# Altium PCB 388D_Control_v1_PCB1_temp.PcbDoc (part 3 of 4)
Units mil, origin at the board's own origin, x right, y up, seen from the top; angles counter-clockwise.
Board outline 4500 x 3200 mil, 6 copper layers (Top Layer, Singal Layer 2, Signal layer 3, Signal Layer 4, Signal Layer 5, Bottom Layer), stack 63.307 mil thick; 386 components, 377 nets, 1673 pads, 351 vias.
Unrouted connection lines stored in the file: 1151.
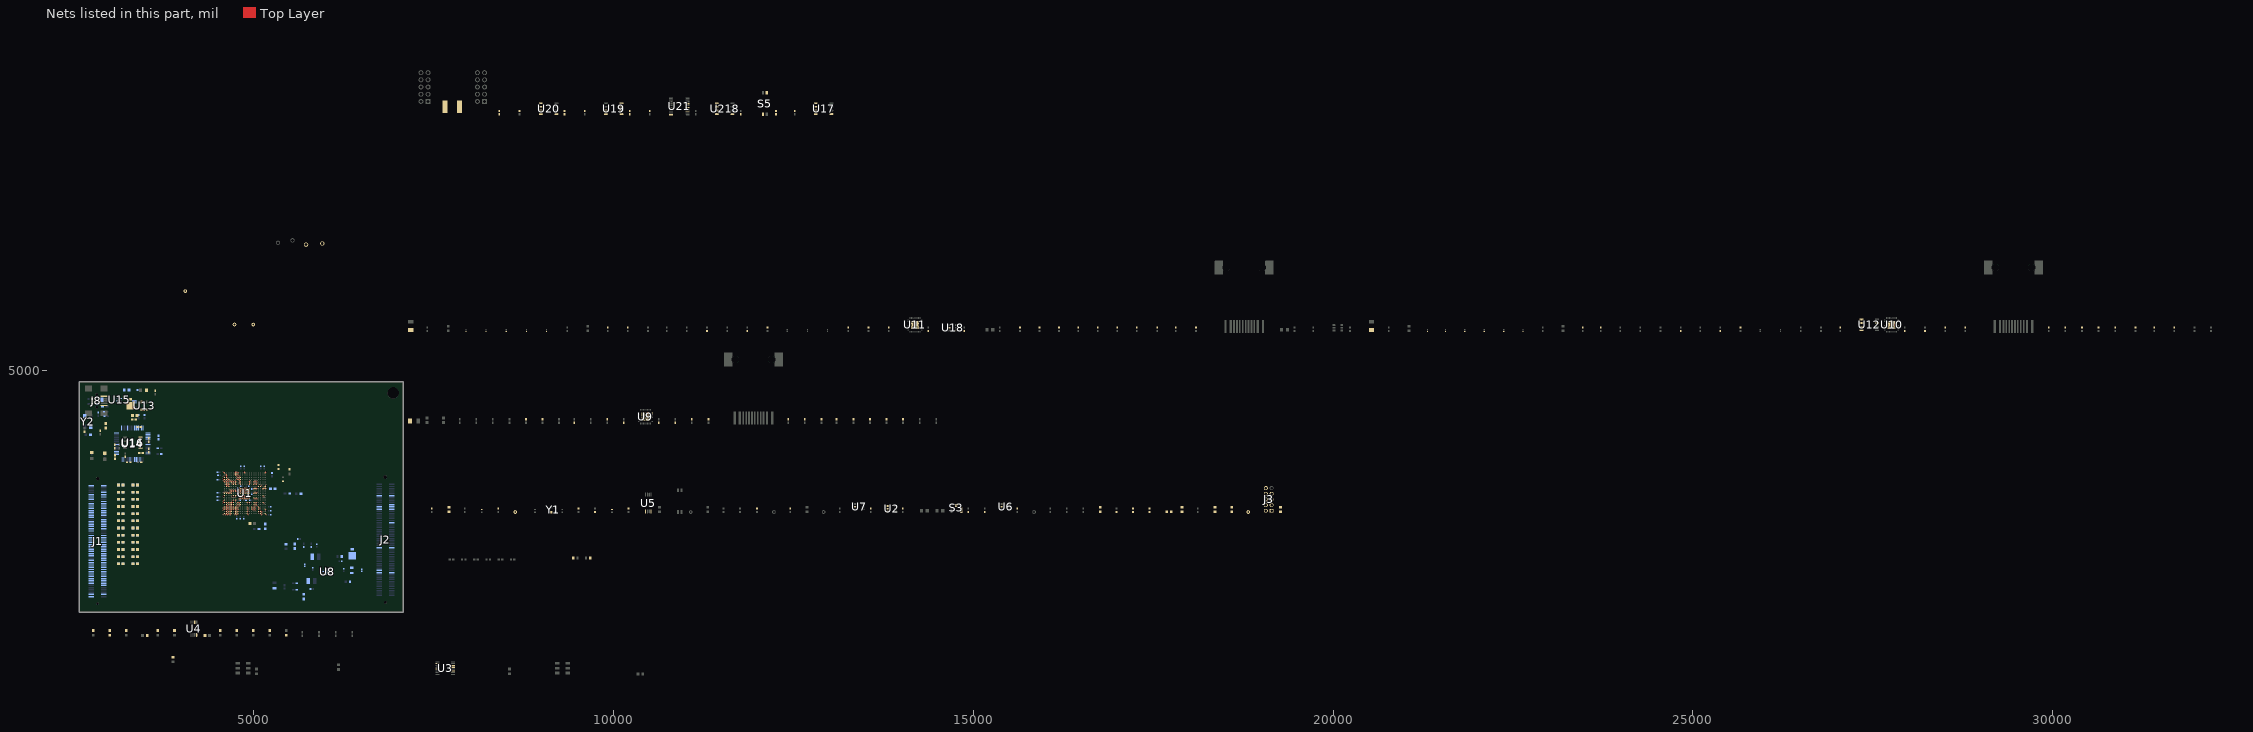
[diagram p2: the nets of this part, all layers, seen from the top]

## Part data (continued)
R154: library part CMP-0026834-3, "RES, 12 k, 5%, 0.063 W, AEC-Q200 Grade 0, 0402", Manufacturer=Vishay-Dale, Power_W=63mW, Supplier Part Number 1=541-12KJCT-ND, TempCo="200 ppm/C", Tolerance_%=5%, Value2=0.063W, Value_Code=12k0, ValueDisplayed=12k, AEC Category=Q200, AEC Grade=0, AEC Qualified=Y, ComponentLink1Description="Datasheet link", ComponentLink1URL=http://www.vishay.com/docs/20035/dcrcwe3.pdf, CompType=Resistor, EIA_Code=E24, MountType=SMT, PackageReference=0402, PartNumber=CRCW040212K0JNED, Res_ohm=12k, RoHS=E, SizeArea_mm2=0.5, SizeX_mm=1, SizeY_mm=0.5, SizeZ_mm=0.6, Supplier 1=Digi-Key, Supplier 2=Newark, Supplier 3=Mouser, Supplier Part Number 2=89M6603, Supplier Part Number 3=71-CRCW040212K0JNED, Technology="Thick Film", Value1=5%, VDC_V=50V
S1 S2: library part CMP-0002233-1, "Switch, Dual SPDT,  2 Pos, 0.1A, 6VDC, SMD", CurrentRating_mA=100A, Manufacturer="Copal Electronics", Supplier Part Number 1=CASD20JCT-ND, Circuit=SPDT, ComponentLink1Description="Datasheet Link", ComponentLink1URL=http://www.nidec-copal-electronics.com/e/catalog/switch/cas.pdf, CompType=Switch, LatestRevisionDate=2017-03-09, MountType=SMT, Orientation="Top Actuated", PackageReference=5.4x3.9mm, PartNumber=CAS-D20TA, PositionCount=2, Publisher="Texas Instruments", RoHS=Y, Supplier 1=Digi-Key, SwitchFunction=On-On, VDC_V=6V
S3: library part CMP-0002193-2, "Switch, SPST-NO, Off-Mom, 12 V, SMD", CurrentRating_mA=50A, Manufacturer="Omron Electronic Components", Supplier Part Number 1=SW1021CT-ND, Circuit=SPST-NO, ComponentLink1Description="Datasheet URL", ComponentLink1URL=http://www.omron.com/ecb/products/pdf/en-b3u.pdf, CompType=Switch, LatestRevisionDate=2017-03-09, MountType=SMT, Orientation="Top Actuated", PackageReference="SMD, 3-Leads, Body 3x2.5mm", PartNumber=B3U-1100P, PositionCount=1, Publisher="Texas Instruments", RoHS=Y, Supplier 1=Digi-Key, Supplier 2=Newark, Supplier 3=Mouser, Supplier Part Number 2=39M4619, Supplier Part Number 3=653-B3U-1100P, SwitchFunction=Off-Mom, VDC_V=12V
S4 S5: library part CMP-0002230-1, "Switch, SPST, 2 Pos, 25mA, 24VDC, SMD", CurrentRating_mA=25A, Manufacturer="CTS Electrocomponents", Supplier Part Number 1=CT2182LPST-ND, Circuit=SPST, ComponentLink1Description="Datasheet Link", ComponentLink1URL=http://www.ctscorp.com/components/Datasheets/218.pdf, CompType=Switch, LatestRevisionDate=2017-03-09, MountType=SMT, Orientation="Top Actuated", PackageReference=3.71x5.8mm, PartNumber=218-2LPST, PositionCount=2, Publisher="Texas Instruments", RoHS=Y, Supplier 1=Digi-Key, Supplier 2=Mouser, Supplier Part Number 2=774-2182LPST, SwitchFunction=Off-On, VDC_V=24V
TP1 TP2 TP3 TP4: library part CMP-002-00037-2, "Test Point, Orange, Height 4.6 mm, Tail Length 3 mm, 1-Pin THD, RoHS", Colour=Orange, Manufacturer=Keystone, Package Description="1-Pin Through Hole Device, Dia 2.54 mm", Package Quantity=10, Case/Package=5003, Connector Type=TestPoint, Contact Material=Bronze, Contact Plating=Tin, Datasheet URL=http://keyelco.com/userAssets/file/M65p56.pdf, Datasheet Version=Jun-15, Diameter=2.54mm, Manufacturer URL=http://www.keyelco.com/, Mounting Technology=TH, Package Reference=5003, Packaging=Bulk, Pins=1, RoHS Compliant=True
TP5 TP6 TP7 TP8 TP9 TP10 TP11 TP12 TP13: library part CMP-0078143-3, "TEST POINT.  No entry in BOM.", Manufacturer=N/A, CompType=Testpoint, PackageReference=N/A, PartNumber=N/A
U1: library part CMP-012-000147-1, "TMS320F28388DZWTS, ZWT0337A (NFBGA-337)", Alternate Manufacturer="Texas Instruments", AEC Category=Q200, AEC Qualified=N, Available Preview Images=2D, ComponentLink1Description="Datasheet Link", ComponentLink1URL=http://www.ti.com/lit/ds/symlink/tms320f28388d.pdf, ComponentLink2Description="Product Folder", ComponentLink2URL=http://www.ti.com/product/tms320f28388d, ComponentLink3Description="Online Datasheet", ComponentLink3URL=http://www.ti.com/product/tms320f28388d/datasheet, CompType=IC, Design Item ID=TMS320F28388DZWTS, Manufacturer="Texas Instruments", MountType=SMT, PackageDescription=NFBGA-337, PackageReference=ZWT0337A, PartNumber=TMS320F28388DZWTS, SizeArea_mm2=256, SizeAreaWB_mm2=324, SizeX_mm=16, SizeY_mm=16, SizeZ_mm=1.4, Source=SamacSys.SchLib
U2: library part CMP-0051789-2, "Dual Buffer/Driver with Open-Drain Output, DBV0006A, LARGE T&R", F @ Nom Voltage(Max)(Mhz)=150, Generic Part Number=SN74LVC2G07, ICC @ Nom Voltage(Max)(mA)=0.01, Manufacturer="Texas Instruments", Operating Temperature Range(C)="-40 to 125", Rating=Catalog, tpd @ Nom Voltage(Max)(ns)=8.6,4.4,3.7,2.9, Voltage(Nom)(V)=1.8,2.5,3.3,5, 3-State Output=No, AEC Category=Q200, AEC Qualified=N, Bits(#)=2, ComponentLink1Description="Datasheet Link", ComponentLink1URL=http://www.ti.com/lit/ds/symlink/sn74lvc2g07.pdf, ComponentLink2Description="Product Folder", ComponentLink2URL=http://www.ti.com/product/sn74lvc2g07, ComponentLink3Description="Online Datasheet", ComponentLink3URL=http://www.ti.com/product/sn74lvc2g07/datasheet, CompType=IC, DatasheetVersion=SCES308K, Green_EU RoHS=Passed, Green_EU RoHS-2=Passed, Green_Lifecycle=Active, Green_REACh=Passed, Input Type=CMOS/TTL, Logic=True, MountType=SMT, Output Drive (IOL/IOH)(Max)(mA)=32/-32, Output Type=CMOS, PackageDescription=SOT-23-6, PackageReference=DBV0006A, PartNumber=SN74LVC2G07DBVR, RoHS=Y, Schmitt Trigger=No, SizeArea_mm2=8.12, SizeAreaWB_mm2=14.82, SizeX_mm=2.8, SizeY_mm=2.9, SizeZ_mm=1.45, Sub-Family="Inverting Buffer/Driver", Technology Family=LVC, VCC(Max)(V)=5.5, VCC(Min)(V)=1.65
U3: library part CMP-014-00004-2, "High-Speed, Single-Supply, Rail-to-Rail Operational Amplifier MicroAmplifier(TM) Series, 2.7 to 5.5 V, -55 to 150 degC, 16-pin SOP (DBQ16), Green (RoHS & no Sb/Br)", Case/Package="16-Pin, Plastic Small Outline, Body 3.9 x 4.9 mm, Pitch 0.635 mm", Manufacturer="Texas Instruments", Total Supply Voltage(Max)(+5V is 5, +/-5V is 10)=5.5, Total Supply Voltage(Min)(+5V is 5, +/-5V is 10)=2.7, Available Preview Images=2D, CMRR(Min)(dB)=66, Code_JEDEC=MO-137, ComponentLink1Description="Manufacturer URL", ComponentLink1URL=http://www.ti.com/, ComponentLink2Description=Datasheet, ComponentLink2URL=http://www.ti.com/general/docs/lit/getliterature.tsp?genericPartNumber=OPA4350&fileType=pdf, ComponentLink3Description="Package Specification", ComponentLink3URL=http://www.ti.com/litv/pdf/msoi004g, DatasheetVersion=SBOS099C, Design Item ID=CMP-0041147-1, Eco-Plan="Green (RoHS & no Sb/Br)", IIB(Max)(pA)=10, Iq per channel(Max)(mA)=7.5, Mounting Technology="Surface Mount", Number of Channels=4, Offset Drift(Typ)(uV/C)=4, PackageReference=DBQ0016A, PackageVersion="4073301-2/H, 10/2008", Slew Rate(Typ)(V/us)=22, Source=SamacSys.SchLib, Sub Family="Low Input Bias Current Amp (<=10pA), Low Offset Voltage Amplifier (<=500uV), Low Supply Voltage Amplifier (<=2.7V), Precision Amplifier", Vio (25C)(Max)(mV)=0.5, Vn at 1kHz(Typ)(nV/rtHz)=18
U4: library part CMP-0032596-2, "Low Noise, Very Low Drift, Precision Series Voltage Reference, DGK0008A (VSSOP-8)", Manufacturer="Texas Instruments", Rating=Catalog, Temp Coeff(Max)(ppm/ degree C)=3, AEC Category=Q200, AEC Qualified=N, Code_JEDEC=MO-187-AA, ComponentLink1Description="Datasheet Link", ComponentLink1URL=http://www.ti.com/lit/ds/symlink/ref5030.pdf, ComponentLink2Description="Product Folder", ComponentLink2URL=http://www.ti.com/product/ref5030, ComponentLink3Description="Online Datasheet", ComponentLink3URL=http://www.ti.com/product/ref5030/datasheet, CompType=IC, DatasheetVersion=SBOS410E, Eco-Plan="Green (RoHS & no Sb/Br)", Initial Accuracy @ 25/deg C(%)=0.05, Iout/Iz(Max)(mA)=10, Iq(Max)(uA)=1000, MountType=SMT, PackageDescription=VSSOP-8, PackageReference=DGK0008A, PackageVersion=4073329/E, PartNumber=REF5030IDGKT, RoHS=Y, SizeArea_mm2=14.7, SizeAreaWB_mm2=23.6, SizeX_mm=4.9, SizeY_mm=3, SizeZ_mm=1.1, SubFamily="Series Voltage Reference", VI(Max)(V)=18, VI(Min)(V)=3.2, VO(V)=3
U5: library part CMP-052-000006-1, "Low Jitter, 1:4 LVCMOS Fan-out Clock Buffer, PW0008A (TSSOP-8)", Alternate Manufacturer="Texas Instruments", Available Preview Images=2D, ComponentLink1Description="Datasheet Link", ComponentLink1URL=http://www.ti.com/lit/ds/symlink/cdclvc1104.pdf, CompType=IC, Design Item ID=CDCLVC1104PW, Green_EU RoHS=Passed, Green_EU RoHS-2=Passed, Green_Lifecycle=Active, Green_REACh=Passed, LatestRevisionDate=2017-06-09, Manufacturer="Texas Instruments", MountType=SMT, PackageDescription=TSSOP-8, PackageReference=PW0008A, PartNumber=CDCLVC1104PW, Publisher="Texas Instruments", RoHS=Y, SizeArea_mm2=19.2, SizeAreaWB_mm2=42.0, SizeX_mm=6.4, SizeY_mm=3.0, SizeZ_mm=1.2, Source=MCU063B.SCHLIB, U/M=EA
U6 U7: library part CMP-052-000005-1, "High-Accuracy, Fixed-Threshold OV/UV Monitor, DDC0006A (SOT-23-T-6)", Alternate Manufacturer="Texas Instruments", Alternate PartNumber=TPS3702CX33DDCR, AEC Category=Q200, AEC Qualified=N, Available Preview Images=2D, ComponentLink1Description="Datasheet Link", ComponentLink1URL=http://www.ti.com/lit/ds/symlink/tps3702.pdf, ComponentLink2Description="Product Folder", ComponentLink2URL=http://www.ti.com/product/tps3702, ComponentLink3Description="Online Datasheet", ComponentLink3URL=http://www.ti.com/product/tps3702/datasheet, CompType=IC, Design Item ID=TPS3702CX33DDCT, Manufacturer="Texas Instruments", MountType=SMT, PackageDescription=SOT-23-T-6, PackageReference=DDC0006A, PartNumber=TPS3702CX33DDCT, RoHS=Y, SizeArea_mm2=4.8675, SizeAreaWB_mm2=10.4675, SizeX_mm=1.65, SizeY_mm=2.95, SizeZ_mm=0.87, Source=MCU063B.SCHLIB
U8: library part CMP-014-000012-1, "Dual, Adjustable, 600mA and 1000mA, 2.25MHz Step-Down Converter with 1-Wire Interface in QFN 10-VSON -40 to 85", Alternate_PartNumber=TPS62420DRCT, Manufacturer="Texas Instruments", CompType=IC, Copyright="Copyright (C) 2025 Ultra Librarian. All rights reserved.", Design Item ID=TPS62420DRCR, Manufacturer_Name="Texas Instruments", Manufacturer_Part_Number=TPS62420DRCR, MountType=SMT, PackageReference=DRC0010J, PartNumber=TPS62420DRCR, RefDes=RefDes, RoHS=Y, Source=SamacSys.SchLib, Type=TYPE
U9 U10 U11: library part CMP-0076010-4, "Robust, Low Power 10/100 Ethernet Physical Layer Transceiver, RHB0032B (VQFN-32)", Alternate Manufacturer="Texas Instruments", Alternate PartNumber=DP83822IRHBT, AEC Category=Q200, AEC Qualified=N, ComponentLink1Description="Datasheet Link", ComponentLink1URL=http://www.ti.com/lit/ds/symlink/dp83822i.pdf, ComponentLink2Description=ComponentLink2Description, ComponentLink2URL=http://www.ti.com/product/dp83822i, ComponentLink3Description="Online Datasheet", ComponentLink3URL=http://www.ti.com/product/GPN/datasheet, CompType=IC, Manufacturer="Texas Instruments", MountType=SMT, PackageDescription=VQFN-32, PackageReference=RHB0032B, PartNumber=DP83822IRHBR, RoHS=Y, SizeArea_mm2=25.0, SizeAreaWB_mm2=49.0, SizeX_mm=5.0, SizeY_mm=5.0, SizeZ_mm=1.0
U12: library part CMP-0082059-1, "16 Kb I2C EEPROM Serial, SOIC-8", Manufacturer="ON Semiconductor", Supplier Part Number 1=CAT24C16WI-GT3CT-ND, ComponentLink1Description="Datasheet URL", ComponentLink1URL=https://www.onsemi.com/pub/Collateral/CAT24C01-D.PDF, MountType=SMT, PackageReference=SOIC-8, PartNumber=CAT24C16WI-GT3, RoHS=Y, SizeArea_mm2=29.351, SizeAreaWB_mm2=55.131, SizeX_mm=5.99, SizeY_mm=4.9, SizeZ_mm=1.75, Supplier 1=Digi-Key, Supplier 2=Newark, Supplier 3=Mouser, Supplier Part Number 2=23AC2979, Supplier Part Number 3=698-CAT24C16WI-GT3
U13: library part CMP-0073823-1, "Low-Noise, High PSRR, RF 200-mA Low-Dropout Linear Regulators, DBV0005A (SOT-23-5)", Alternate Manufacturer="Texas Instruments", Alternate PartNumber=TPS73033DBVT, ComponentLink1Description="Datasheet Link", ComponentLink1URL=http://www.ti.com/lit/ds/symlink/tps730.pdf, CompType=IC, Footprint Path 6=C:\AltiumLibraries\Footprints\TI\.PcbLib, Green_EU RoHS=Passed, Green_EU RoHS-2=Passed, Green_Lifecycle=Active, Green_REACh=Passed, LatestRevisionDate=2017-06-09, Manufacturer="Texas Instruments", MountType=SMT, PackageDescription=SOT-23-5, PackageReference=DBV0005A, PartNumber=TPS73033DBVR, Publisher="Texas Instruments", RoHS=Y, SizeArea_mm2=8.12, SizeAreaWB_mm2=14.82, SizeX_mm=2.8, SizeY_mm=2.9, SizeZ_mm=1.45, U/M=EA
U14: library part CMP-0004796-1, "Dual High Speed USB To Multipurpose UART/FIFO IC, LQFP-64", Manufacturer=FTDI, Supplier Part Number 1=768-1024-1-ND, ComponentLink1Description="Datasheet URL", ComponentLink1URL=http://www.ftdichip.com/Support/Documents/DataSheets/ICs/DS_FT2232H.pdf, LatestRevisionDate=09/03/2017, MountType=SMT, PackageReference=LQFP_10x10mm, PartNumber=FT2232HL-REEL, Publisher="Texas Instruments", RoHS=Y, Supplier 1=Digi-Key, Supplier 2=Mouser, Supplier Part Number 2=895-FT2232HL
U15: library part CMP-0043096-2, "Low-Capacitance + / - 15 kV ESD-Protection Array for High-Speed Data Interfaces, 2 Channels, -40 to +85 degC, 5-pin SOT (DRL), Green (RoHS & no Sb/Br)", Breakdown Voltage(Min)(V)=11, IO Capacitance(Typ)(pF)=1.5, IO Leakage Current(nA)=1, Manufacturer="Texas Instruments", ComponentLink1Description="Manufacturer URL", ComponentLink1URL=http://www.ti.com/, ComponentLink2Description=Datasheet, ComponentLink2URL=http://www.ti.com/general/docs/lit/getliterature.tsp?genericPartNumber=TPD2E001&fileType=pdf, ComponentLink3Description="URL Link1", ComponentLink3URL=SamplesURL:http://www.ti.com/product/tpd2e001#samples, DatasheetVersion=SLLS684F, Eco-Plan="Green (RoHS & no Sb/Br)", IEC 61000-4-2 Air-Gap(+/- kV)=15, IEC 61000-4-2 Contact(+/- kV)=8, Mounting Technology="Surface Mount", PackageDescription="5-Pin Plastic Small Outline, Flat Lead 0.5 mm Pitch", PackageReference=DRL0005A, PackageVersion="revD, Aug-2007", PartNumber=TPD2E001DRLR, SubFamily="ESD Solution", USB High Speed=TRUE
U16: library part CMP-0005261-2, "2K Microwire Compatible Serial EEPROM, SOIC-8", Manufacturer=Microchip, Supplier Part Number 1=93LC56C-I/SN-ND, ComponentLink1Description="Datasheet URL", ComponentLink1URL=http://ww1.microchip.com/downloads/en/DeviceDoc/21794G.pdf, LatestRevisionDate=09/03/2017, MountType=SMT, PackageReference=SOIC-8, PartNumber=93LC56C-I/SN, Publisher="Texas Instruments", RoHS=Y, SizeArea_mm2=29.351, SizeAreaWB_mm2=55.131, SizeX_mm=5.99, SizeY_mm=4.9, SizeZ_mm=1.75, Supplier 1=Digi-Key, Supplier 2=Newark, Supplier 3=Mouser, Supplier Part Number 2=30H4775, Supplier Part Number 3=579-93LC56C-I/SNG
U17 U19 U20 U218: library part CMP-0029375-1, "25 Mbps Dual Channels, 2 / 0, Digital Isolator, 3.3 V / 5 V, -40 to +125 degC, 8-pin SOIC (D), Green (RoHS & no Sb/Br)", Insulation Rating(VRMS)=2500, Manufacturer="Texas Instruments", Rating=Catalog, Supply Voltage(s)(V)="3.3, 5", Channel Configuration=2/01/2000, ComponentLink1Description="Manufacturer URL", ComponentLink1URL=http://www.ti.com/, ComponentLink2Description=Datasheet, ComponentLink2URL=http://www.ti.com/general/docs/lit/getliterature.tsp?genericPartNumber=ISO7220C&fileType=pdf, ComponentLink3Description="URL Link1", ComponentLink3URL=SamplesURL:http://www.ti.com/product/iso7220c#samples, Datarate(Mbps)=25, DatasheetVersion=SLLS755L, Eco-Plan="Green (RoHS & no Sb/Br)", Input Noise Filter=Yes, Mounting Technology="Surface Mount", PackageDescription="8-Pin Plastic Small Outline Integrated Circuit, 4.9 x 3.9 mm, Pitch 1.27 mm Pitch", PackageReference=D0008B, PackageVersion="revM, Jun-2011", PartNumber=ISO7220CD, Prop Delay(Max)(ns)=42, SubFamily=Isolator, Thermal Shutdown=No, TTL/CMOS Input Threshold=TTL
U18 U22: library part CMP-0051777-2, "Dual Inverter Buffer/Driver with Open-Drain Output, DBV0006A, LARGE T&R", F @ Nom Voltage(Max)(Mhz)=150, Generic Part Number=SN74LVC2G06, ICC @ Nom Voltage(Max)(mA)=0.01, Manufacturer="Texas Instruments", Operating Temperature Range(C)="-40 to 125,-40 to 85", Rating=Catalog, tpd @ Nom Voltage(Max)(ns)=8.2,4.4,3.9,3.4, Voltage(Nom)(V)=1.8,2.5,3.3,5, 3-State Output=No, Bits(#)=2, DatasheetVersion=SCES307I, Input Type=CMOS/TTL, Logic=Inverting, Output Drive (IOL/IOH)(Max)(mA)=32/-32, Output Type=CMOS, PackageReference=DBV0006A, PartNumber=SN74LVC2G06DBVR, Schmitt Trigger=No, Sub-Family="Inverting Buffer/Driver", Technology Family=LVC, VCC(Max)(V)=5.5, VCC(Min)(V)=1.65
U21: library part CMP-0047070-3, "Octal Buffer/Driver With 3-State OUtputs, PW0020A (TSSOP-20)", Alternate Manufacturer="Texas Instruments", Alternate PartNumber=SN74ALVC244PW, F @ Nom Voltage(Max)(Mhz)=100, Generic Part Number=SN74ALVC244, ICC @ Nom Voltage(Max)(mA)=0.024, Operating Temperature Range(C)="-40 to 85", Rating=Catalog, tpd @ Nom Voltage(Max)(ns)=4.4,3.1,2.8, Voltage(Nom)(V)=1.8,2.5,2.7,3.3, AEC Category=Q200, AEC Qualified=N, Bits(#)=8, Code_JEDEC=MO-153, ComponentLink1Description="Datasheet Link", ComponentLink1URL=http://www.ti.com/lit/ds/symlink/sn74alvc244.pdf, ComponentLink2Description="Product Folder", ComponentLink2URL=http://www.ti.com/product/sn74alvc244, ComponentLink3Description="Online Datasheet", ComponentLink3URL=http://www.ti.com/product/sn74alvc244/datasheet, CompType=IC, DatasheetVersion=SCES188G, Input Type=LVTTL, Manufacturer="Texas Instruments", MountType=SMT, Output Type=LVTTL, PackageDescription=TSSOP-20, PackageReference=PW0020A, PackageVersion=http://www.ti.com/lit/ml/mpds362/mpds362.pdf, PartNumber=SN74ALVC244PWR, RoHS=Y, SizeArea_mm2=43.56, SizeAreaWB_mm2=73.96, SizeX_mm=6.6, SizeY_mm=6.6, SizeZ_mm=1.2, VCC(Max)(V)=3.6, VCC(Min)(V)=1.65
Y1: library part CMP-052-000000-1, "Oscillator, 25 MHz, 15 pF, SMD", Frequency Stability="10 ppm", Frequency_Fixed=25MHz, Load Capacitance=15pF, Manufacturer="ECS Inc.", PartNumber=ECS-2520S33-250-FN-TR, AEC Category=Q200, AEC Grade=N/A, AEC Qualified=N, Available Preview Images=2D, ComponentLink1Description="Datasheet Link", ComponentLink1URL=https://www.ecsxtal.com/store/pdf/ECS-2520S.pdf, CompType=Oscillator, Design Item ID=CMP-0082061-2, MountType=SMT, PackageReference=2x2.5mm, RoHS=Y, SizeArea_mm2=5, SizeAreaWB_mm2=10.5, SizeX_mm=2, SizeY_mm=2.5, SizeZ_mm=1, Source=MCU063B.SCHLIB, TaMax_C=85¡ÆC, TaMin_C=-40¡ÆC
Y2: library part CMP-0004646-3, "Crystal, 12 MHz, 20pF, SMD", Frequency Stability=+/-50ppm, Frequency_Fixed=12MHz, Manufacturer="ECS Inc.", Supplier Part Number 1=XC1118CT-ND, ComponentLink1Description="Datasheet Link", ComponentLink1URL=http://www.ecsxtal.com/store/pdf/ecx_53b.pdf, CompType=Crystal, MountType=SMT, PackageReference=5x3.2mm, PartNumber=ECS-120-20-30B-TR, RoHS=Y, Supplier 1=Digi-Key, Supplier 2=Mouser, Supplier Part Number 2=520-ECS-120-20-30B, TaMax_C=70¡ÆC, TaMin_C=-20¡ÆC

## Free pads (board coordinates)
  round 157.48 hole 157.48: 2(6940,4690)

## Via types
v1: diameter 18, hole 8, Top Layer to Bottom Layer, tented both sides, 334 vias
v2: diameter 19.68, hole 7.87, Top Layer to Bottom Layer, tented both sides, 15 vias
v3: diameter 22, hole 8, Top Layer to Bottom Layer, tented both sides, 1 vias
v4: diameter 18/18/18/18/18/18 (per signal layer), hole 8, Top Layer to Bottom Layer, tented both sides, 1 vias

## Nets (pads, with @x,y where several pads share a name; then routed paths per layer and width w, separated by ;. In a path a pad name is that pad's centre, name@x,y a point inside that pad or via, vN(x,y) a via of type N, cw(c..) or ccw(c..) an arc to the next point about the centre after c; other vN are vias at no path point)
1V2: C36.1 C37.1 C71.2 D2.2 L2.2 L5.1 R50.2
3V3: C35.1 C42.1 C53.1 D2.1 J2.19 J3.10 L1.2 L3.1 L4.1 R44.2 R47.2 R48.2
25MHZ_CLK: U5.1 Y1.3
1415_N: C4.1 R18.1 U1.U4 | length 22.3
  Top Layer w6.25: v1(4673.27,3059.13) U1.U4@4689.02,3074.88
1415_P: C16.1 R17.1 U1.T4 | length 22.3
  Top Layer w6.25: v1(4673.27,3090.63) U1.T4@4689.02,3106.38
A0A1_N: C1.1 R11.1 U1.T1 | length 22.3
  Top Layer w6.25: v1(4578.78,3090.63) U1.T1@4594.53,3106.38
A0A1_P: C13.1 R10.1 U1.U1 | length 22.3
  Top Layer w6.25: v1(4578.78,3059.13) U1.U1@4594.53,3074.88
A2A3_N: C2.1 R13.1 U1.T2 | length 22.3
  Top Layer w6.25: v1(4610.28,3090.63) U1.T2@4626.02,3106.38
A2A3_P: C14.1 R12.1 U1.U2 | length 22.3
  Top Layer w6.25: v1(4610.28,3059.13) U1.U2@4626.02,3074.88
A4A5_N: C3.1 R15.1 U1.T3 | length 22.3
  Top Layer w6.25: v1(4641.77,3090.63) U1.T3@4657.52,3106.38
A4A5_P: C15.1 R14.1 U1.U3 | length 22.3
  Top Layer w6.25: v1(4641.77,3059.13) U1.U3@4657.52,3074.88
ADC_3V0_REF: R42.2 U4.6
ADC_A0A1_N: J1.11 R11.2
ADC_A0A1_P: J1.9 R10.2
ADC_A2A3_N: J1.17 R13.2
ADC_A2A3_P: J1.15 R12.2
ADC_A4A5_N: J1.23 R15.2
ADC_A4A5_P: J1.21 R14.2
ADC_B0B1_N: J1.14 R20.2
ADC_B0B1_P: J1.12 R19.2
ADC_B2B3_N: J1.20 R22.2
ADC_B2B3_P: J1.18 R21.2
ADC_B4B5_N: J1.26 R24.2
ADC_B4B5_P: J1.24 R23.2
ADC_C2C3_N: J1.33 R27.2
ADC_C2C3_P: J1.31 R26.2
ADC_C4C5_N: J1.39 R29.2
ADC_C4C5_P: J1.37 R28.2
ADC_D0D1_N: J1.30 R32.2
ADC_D0D1_P: J1.28 R31.2
ADC_D2D3_N: J1.36 R34.2
ADC_D2D3_P: J1.34 R33.2
ADC_D4D5_N: J1.42 R36.2
ADC_D4D5_P: J1.40 R35.2
ADC_IN1415_N: J1.27 R18.2
ADC_IN1415_P: J1.25 R17.2
ADC_REF: C33.1 R43.2 U3.2 U3.5 U3.11 U3.14
B0B1_N: C5.1 R20.1 U1.W2 | length 22.3
  Top Layer w6.25: v1(4610.28,2996.14) U1.W2@4626.02,3011.89
B0B1_P: C17.1 R19.1 U1.V2 | length 22.3
  Top Layer w6.25: v1(4610.28,3027.64) U1.V2@4626.02,3043.39
B2B3_N: C6.1 R22.1 U1.W3 | length 22.3
  Top Layer w6.25: v1(4641.77,2996.14) U1.W3@4657.52,3011.89
B2B3_P: C18.1 R21.1 U1.V3 | length 22.3
  Top Layer w6.25: v1(4641.77,3027.64) U1.V3@4657.52,3043.39
B4B5_N: C7.1 R24.1 U1.W4 | length 22.3
  Top Layer w6.25: v1(4673.27,2996.14) U1.W4@4689.02,3011.89
B4B5_P: C19.1 R23.1 U1.V4 | length 22.3
  Top Layer w6.25: v1(4673.27,3027.64) U1.V4@4689.02,3043.39
C2C3_N: C8.1 R27.1 U1.P3 | length 22.3
  Top Layer w6.25: v1(4641.77,3153.62) U1.P3@4657.52,3169.37
C2C3_P: C20.1 R26.1 U1.R3 | length 22.3
  Top Layer w6.25: v1(4641.77,3122.13) U1.R3@4657.52,3137.87
C4C5_N: C9.1 R29.1 U1.P4 | length 22.3
  Top Layer w6.25: v1(4673.27,3153.62) U1.P4@4689.02,3169.37
C4C5_P: C21.1 R28.1 U1.R4 | length 22.3
  Top Layer w6.25: v1(4673.27,3122.13) U1.R4@4689.02,3137.87
D0D1_N: C10.1 R32.1 U1.U5 | length 22.3
  Top Layer w6.25: v1(4704.76,3059.13) U1.U5@4720.51,3074.88
D0D1_P: C22.1 R31.1 U1.T5 | length 22.3
  Top Layer w6.25: v1(4704.76,3090.63) U1.T5@4720.51,3106.38
D2D3_N: C11.1 R34.1 U1.U6 | length 22.3
  Top Layer w6.25: v1(4736.26,3059.13) U1.U6@4752.01,3074.88
D2D3_P: C23.1 R33.1 U1.T6 | length 22.3
  Top Layer w6.25: v1(4736.26,3090.63) U1.T6@4752.01,3106.38
D4D5_N: C12.1 R36.1 U1.U7 | length 22.3
  Top Layer w6.25: v1(4767.76,3059.13) U1.U7@4783.5,3074.88
D4D5_P: C24.1 R35.1 U1.T7 | length 22.3
  Top Layer w6.25: v1(4767.76,3090.63) U1.T7@4783.5,3106.38
EMU0: J1.2 R2.2
EMU1: J1.1 R1.1
EMU_1V8: C136.2 C137.2 C138.2 C139.2 U14.12 U14.37 U14.49 U14.64
EMU_3V3: C133.1 C140.2 C141.2 C142.2 C143.2 C151.2 C154.2 C156.2 C158.2 L6.2 L7.2 R142.1 R143.2 R145.2 R149.1 R151.1 TP12.1 U13.5 U14.20 U14.31 U14.42 U14.50 U14.56 U16.6 U16.8 U17.1 U19.8 U20.1 U218.1
EMU_5V0: C132.2 C134.1 D7.1 D9.2 D10.2 TP11.1 U13.1 U13.3 U15.1
EMU_GND: C132.1 C133.2 C134.2 C135.1 C136.1 C137.1 C138.1 C139.1 C140.1 C141.1 C142.1 C143.1 C144.2 C145.1 C146.2 C147.1 C148.1 C149.1 C150.1 C151.1 C154.1 C156.1 C158.1 C160.2 D8.1 J8.5 R146.2 R152.2 R153.1 R154.1 R155.1 TP13.1 U13.2 U14.1 U14.5 U14.10 U14.11 U14.13 U14.15 U14.25 U14.35 U14.47 U14.51 U15.4 U16.5 U17.4 U19.5 U20.3 U20.4 U218.4 Y2.2 Y2.4
EMU_SCI-RX: U14.38 U20.2
EMU_SCI-TX: U14.39 U19.6
EMU_TCK: R144.1 U14.16 U218.2
EMU_TDI: U14.17 U17.2
EMU_TDO: U14.18 U19.7
EMU_TMS: R143.1 U14.19 U218.3
EMU_TRSTn: U14.21 U17.3
EMU_USB_5V0: D7.2 J8.1
ENET_PHY_CLK: R77.2 U9.23
ERRORSTS: J2.78 R64.2 TP5.1 U1.U19 | length 22.3
  Top Layer w6.25: U1.U19@5161.46,3074.88 v1(5177.2,3059.13)
F2838x_25MHZ_CLK: R83.2 R85.2
F2838x_CLK: R63.2 R85.1 TP10.1 U1.G19 | length 22.3
  Top Layer w6.25: U1.G19@5161.46,3389.84 v1(5177.2,3405.59)
HSEC_ADC-VREFHI: J1.45 R41.1
HSEC_GPIO8: J1.57 R56.2
HSEC_GPIO9: J1.59 R58.2
HSEC_GPIO10: J1.61 R57.1
HSEC_GPIO25: J1.77 R60.1
HSEC_GPIO26: J1.79 R61.2
HSEC_GPIO27: J1.81 R65.2
IN_5V0: C38.2 C39.2 D1.1 R45.2 R46.2 R51.2 U8.3
MCU_GPIO0: J1.49 U1.C8 | length 22.3
  Top Layer w6.25: v1(4799.25,3531.57) U1.C8@4815,3515.83
MCU_GPIO1: J1.51 U1.D8 | length 22.3
  Top Layer w6.25: v1(4799.25,3500.08) U1.D8@4815,3484.33
MCU_GPIO2: J1.53 U1.A7 | length 22.3
  Top Layer w6.25: v1(4767.76,3594.57) U1.A7@4783.5,3578.82
MCU_GPIO3: J1.55 U1.B7 | length 22.3
  Top Layer w6.25: v1(4767.76,3563.07) U1.B7@4783.5,3547.32
MCU_GPIO4: C1.2 C2.2 C3.2 C4.2 C5.2 C6.2 C7.2 C8.2 C9.2 C10.2 C11.2 C12.2 C13.2 C14.2 C15.2 C16.2 C17.2 C18.2 C19.2 C20.2 C21.2 C22.2 C23.2 C24.2 C25.1 C26.2 C27.2 C28.2 C29.2 C30.2 C31.2 C32.2 C33.2 C34.2 C35.2 C37.2 C38.1 C39.1 C40.1 C41.1 C42.2 C43.2 C44.1 C45.1 C46.1 C47.1 C48.1 C49.1 C50.1 C51.1 C52.1 C53.2 C54.2 C55.1 C56.1 C57.1 C58.1 C59.1 C60.1 C61.1 C62.1 C63.1 C64.1 C65.1 C66.1 C67.1 C68.1 C69.1 C70.1 C71.1 C72.1 C73.2 C74.2 C75.2 C76.2 C77.2 C78.2 C79.2 C80.2 C81.2 C82.2 C83.2 C84.2 C85.2 C86.2 C87.2 C88.2 C89.1 C90.1 C91.1 C92.1 C93.2 C94.2 C95.1 C96.2 C97.2 C98.2 C99.2 C100.2 C101.2 C102.2 C103.2 C104.2 C105.2 C106.1 C107.1 C108.2 C109.1 C110.1 C111.2 C112.2 C113.1 C114.2 C115.2 C116.2 C117.2 C118.2 C119.2 C120.2 C121.2 C122.2 C123.2 C124.1 C125.1 C126.2 C127.1 C128.1 C129.2 C130.2 C131.1 C152.2 C153.1 C155.2 C157.2 C159.2 C160.1 D1.2 J1.7 J1.10 J1.19 J1.22 J1.35 J1.38 J1.46 J1.47 J1.48 J1.50 J1.65 J1.83 J1.84 J1.86 J1.97 J1.98 J1.100 J2.11 J2.12 J2.35 J2.57 J2.58 J2.79 J2.80 J3.4 J3.8 LED1.1 R52.1 R53.1 R54.1 R55.1 R62.1 R63.1 R64.1 R70.1 R79.2 R80.1 R82.2 R86.2 R89.2 R104.2 R111.1 R112.1 R113.1 R114.1 R115.1 R116.1 R123.2 R124.2 R128.2 R135.1 R136.1 R137.1 R138.1 R139.1 S3.2 S3.3 S5.1 TP1.1 TP4.1 U1.A1 U1.A10 U1.A19 U1.C7 U1.E5 U1.E6 U1.E8 U1.E12 U1.E14 U1.E15 U1.F5 U1.F6 U1.F8 U1.F12 U1.F14 U1.F15 U1.G16 U1.G17 U1.H8 U1.H9 U1.H10 U1.H11 U1.H12 U1.H14 U1.H15 U1.H18 U1.H19 U1.J5 U1.J6 U1.J8 U1.J9 U1.J10 U1.J11 U1.J12 U1.K8 U1.K9 U1.K10 U1.K11 U1.K12 U1.K14 U1.K15 U1.L5 U1.L6 U1.L8 U1.L9 U1.L10 U1.L11 U1.L12 U1.L18 U1.M8 U1.M9 U1.M10 U1.M11 U1.M12 U1.M14 U1.M15 U1.N1 U1.N5 U1.N6 U1.P1 U1.P2 U1.P5 U1.P7 U1.P8 U1.P11 U1.P12 U1.P14 U1.P15 U1.P18 U1.R2 U1.R5 U1.R7 U1.R8 U1.R14 U1.R15 U1.U14 U1.V6 U1.V7 U1.W1 U1.W6 U1.W7 U1.W19 U2.2 U2.3 U3.13 U4.4 U5.4 U6.2 U7.2 U8.8 U8.11 U9.33@10445,4360 U10.33@27760,5635 U11.33@14190,5635 U12.1 U12.2 U12.3 U12.4 U12.7 U17.5 U18.2 U19.4 U20.5 U21.10 U21.13 U21.15 U21.17 U218.5 Y1.2 | length 1826.2
  Top Layer w6.25: v1(4767.76,3531.57) U1.C7@4783.5,3515.83 ; U1.U14@5003.98,3074.88 v1(5019.72,3059.13) ; U1.P18@5129.96,3169.37 v1(5145.71,3153.62)
  Top Layer w10: v1(4578.78,2996.14) U1.W1@4594.53,3011.89 ; v1(4578.78,3153.62) U1.P1@4594.53,3169.37 ; v1(4578.78,3185.12) U1.N1@4594.53,3200.87 ; v1(4578.78,3594.57) U1.A1@4594.53,3578.82 ; v1(4610.28,3122.13) U1.R2@4626.02,3137.87 ; v1(4610.28,3153.62) U1.P2@4626.02,3169.37 ; v1(4704.76,3122.13) U1.R5@4720.51,3137.87 ; v1(4704.76,3153.62) U1.P5@4720.51,3169.37 ; v1(4704.76,3185.12) U1.N5@4720.51,3200.87 ; v1(4704.76,3248.11) U1.L5@4720.51,3263.86 ; v1(4704.76,3342.6) U1.J5@4720.51,3326.85 ; v1(4704.76,3437.09) U1.F5@4720.51,3421.34 ; v1(4704.76,3468.58) U1.E5@4720.51,3452.83 ; v1(4736.26,2996.14) U1.W6@4752.01,3011.89 ; v1(4736.26,3027.64) U1.V6@4752.01,3043.39 ; v1(4736.26,3185.12) U1.N6@4752.01,3200.87 ; v1(4736.26,3248.11) U1.L6@4752.01,3263.86 ; v1(4736.26,3342.6) U1.J6@4752.01,3326.85 ; v1(4736.26,3437.09) U1.F6@4752.01,3421.34 ; v1(4736.26,3468.58) U1.E6@4752.01,3452.83 ; v1(4767.76,2996.14) U1.W7@4783.5,3011.89 ; v1(4767.76,3027.64) U1.V7@4783.5,3043.39 ; v1(4767.76,3122.13) U1.R7@4783.5,3137.87 ; v1(4767.76,3153.62) U1.P7@4783.5,3169.37 ; v1(4799.25,3122.13) U1.R8@4815,3137.87 ; v1(4799.25,3153.62) U1.P8@4815,3169.37 ; v1(4799.25,3216.61) U1.M8@4815,3232.36 ; v1(4799.25,3248.11) U1.L8@4815,3263.86 ; v1(4799.25,3311.1) U1.K8@4815,3295.35 ; v1(4799.25,3342.6) U1.J8@4815,3326.85 ; v1(4799.25,3374.09) U1.H8@4815,3358.35 ; v1(4799.25,3437.09) U1.F8@4815,3421.34 ; v1(4799.25,3468.58) U1.E8@4815,3452.83 ; v1(4830.75,3216.61) U1.M9@4846.5,3232.36 ; v1(4830.75,3248.11) U1.L9@4846.5,3263.86 ; v1(4830.75,3311.1) U1.K9@4846.5,3295.35 ; v1(4830.75,3342.6) U1.J9@4846.5,3326.85 ; v1(4830.75,3374.09) U1.H9@4846.5,3358.35 ; v1(4862.24,3216.61) U1.M10@4877.99,3232.36 ; v1(4862.24,3248.11) U1.L10@4877.99,3263.86 ; v1(4862.24,3311.1) U1.K10@4877.99,3295.35 ; v1(4862.24,3342.6) U1.J10@4877.99,3326.85 ; v1(4862.24,3374.09) U1.H10@4877.99,3358.35 ; v1(4862.24,3594.57) U1.A10@4877.99,3578.82 ; v1(4893.74,3216.61) U1.M11@4909.49,3232.36 ; v1(4893.74,3248.11) U1.L11@4909.49,3263.86 ; v1(4893.74,3311.1) U1.K11@4909.49,3295.35 ; v1(4893.74,3342.6) U1.J11@4909.49,3326.85 ; v1(4893.74,3374.09) U1.H11@4909.49,3358.35 ; U1.P11@4909.49,3169.37 v1(4925.24,3153.62) ; v1(4925.24,3216.61) U1.M12@4940.98,3232.36 ; v1(4925.24,3248.11) U1.L12@4940.98,3263.86 ; v1(4925.24,3311.1) U1.K12@4940.98,3295.35 ; v1(4925.24,3342.6) U1.J12@4940.98,3326.85 ; v1(4925.24,3374.09) U1.H12@4940.98,3358.35 ; U1.P12@4940.98,3169.37 v1(4956.73,3153.62) ; U1.F12@4940.98,3421.34 v1(4956.73,3437.09) ; U1.E12@4940.98,3452.83 v1(4956.73,3468.58) ; U1.R14@5003.98,3137.87 v1(5019.72,3122.13) ; U1.P14@5003.98,3169.37 v1(5019.72,3153.62) ; U1.M14@5003.98,3232.36 v1(5019.72,3216.61) ; U1.K14@5003.98,3295.35 v1(5019.72,3311.1) ; U1.H14@5003.98,3358.35 v1(5019.72,3374.09) ; U1.F14@5003.98,3421.34 v1(5019.72,3437.09) ; U1.E14@5003.98,3452.83 v1(5019.72,3468.58) ; U1.R15@5035.47,3137.87 v1(5051.22,3122.13) ; U1.P15@5035.47,3169.37 v1(5051.22,3153.62) ; U1.M15@5035.47,3232.36 v1(5051.22,3216.61) ; U1.K15@5035.47,3295.35 v1(5051.22,3311.1) ; U1.H15@5035.47,3358.35 v1(5051.22,3374.09) ; U1.F15@5035.47,3421.34 v1(5051.22,3437.09) ; U1.E15@5035.47,3452.83 v1(5051.22,3468.58) ; U1.G16@5066.97,3389.84 v1(5082.72,3405.59) ; U1.G17@5098.46,3389.84 v1(5114.21,3405.59) ; U1.L18@5129.96,3263.86 v1(5145.71,3248.11) ; U1.H18@5129.96,3358.35 v1(5145.71,3374.09) ; U1.W19@5161.46,3011.89 v1(5177.2,2996.14) ; U1.H19@5161.46,3358.35 v4(5177.2,3374.09)
  Top Layer w15: U1.A19@5161.46,3578.82 v1(5177.2,3594.57)
  other v2: 10445,4312.76 10397.76,4360 10445,4360 10492.24,4360 10445,4407.24 14190,5587.76 27760,5587.76 14142.76,5635 14190,5635 14237.24,5635 27712.76,5635 27760,5635 27807.24,5635 14190,5682.24 27760,5682.24
MCU_GPIO5: J1.52 U1.D7 | length 22.3
  Top Layer w6.25: v1(4767.76,3500.08) U1.D7@4783.5,3484.33
MCU_GPIO6: J1.54 U1.A6 | length 22.3
  Top Layer w6.25: v1(4736.26,3594.57) U1.A6@4752.01,3578.82
MCU_GPIO7: J1.56 U1.B6 | length 22.3
  Top Layer w6.25: v1(4736.26,3563.07) U1.B6@4752.01,3547.32
MCU_GPIO8: J3.1 R56.1 U1.G2 | length 22.3
  Top Layer w6.25: v1(4610.28,3405.59) U1.G2@4626.02,3389.84
MCU_GPIO9: J3.3 R58.1 U1.G3 | length 22.3
  Top Layer w6.25: v1(4641.77,3405.59) U1.G3@4657.52,3389.84
MCU_GPIO10: J3.2 R57.2 U1.B2 | length 22.3
  Top Layer w6.25: v1(4610.28,3563.07) U1.B2@4626.02,3547.32
MCU_GPIO11: J1.63 U1.C1 | length 22.3
  Top Layer w6.25: v1(4578.78,3531.57) U1.C1@4594.53,3515.83
MCU_GPIO12: J1.58 U1.C2 | length 22.3
  Top Layer w6.25: v1(4610.28,3531.57) U1.C2@4626.02,3515.83
MCU_GPIO13: J1.60 U1.D1 | length 26.1
  Top Layer w6.25: v1@4576.04,3502.82 v1(4578.78,3500.08) U1.D1@4594.53,3484.33
MCU_GPIO14: J1.62 U1.D2 | length 22.3
  Top Layer w6.25: v1(4610.28,3500.08) U1.D2@4626.02,3484.33
MCU_GPIO15: J1.64 U1.D3 | length 22.3
  Top Layer w6.25: v1(4641.77,3500.08) U1.D3@4657.52,3484.33
MCU_GPIO16: J1.67 U1.E1 | length 22.3
  Top Layer w6.25: v1(4578.78,3468.58) U1.E1@4594.53,3452.83
MCU_GPIO17: J1.69 U1.E2 | length 22.3
  Top Layer w6.25: v1(4610.28,3468.58) U1.E2@4626.02,3452.83
MCU_GPIO18: J1.71 U1.E3 | length 22.3
  Top Layer w6.25: v1(4641.77,3468.58) U1.E3@4657.52,3452.83
MCU_GPIO19: J1.73 U1.E4 | length 22.3
  Top Layer w6.25: v1(4673.27,3468.58) U1.E4@4689.02,3452.83
MCU_GPIO20: J1.68 U1.F2 | length 22.3
  Top Layer w6.25: v1(4610.28,3437.09) U1.F2@4626.02,3421.34
MCU_GPIO21: J1.70 U1.F3 | length 22.3
  Top Layer w6.25: v1(4641.77,3437.09) U1.F3@4657.52,3421.34
MCU_GPIO22: J1.72 U1.J4 | length 22.3
  Top Layer w6.25: v1(4673.27,3342.6) U1.J4@4689.02,3326.85
MCU_GPIO23: J1.74 U1.K4 | length 22.3
  Top Layer w6.25: v1(4673.27,3311.1) U1.K4@4689.02,3295.35
MCU_GPIO24: J1.75 U1.K3 | length 22.3
  Top Layer w6.25: v1(4641.77,3311.1) U1.K3@4657.52,3295.35
MCU_GPIO25: J3.6 R60.2 U1.K2 | length 22.3
  Top Layer w6.25: v1(4610.28,3311.1) U1.K2@4626.02,3295.35
MCU_GPIO26: J3.5 R61.1 U1.K1 | length 22.3
  Top Layer w6.25: v1(4578.78,3311.1) U1.K1@4594.53,3295.35
MCU_GPIO27: J3.7 R65.1 U1.L1 | length 22.3
  Top Layer w6.25: v1(4578.78,3248.11) U1.L1@4594.53,3263.86
MCU_GPIO28: J1.76 S5.3 U1.V11 | length 22.3
  Top Layer w6.25: U1.V11@4909.49,3043.39 v1(4925.24,3027.64)
MCU_GPIO29: J1.78 U1.W11 U19.3 | length 22.3
  Top Layer w6.25: U1.W11@4909.49,3011.89 v1(4925.24,2996.14)
MCU_GPIO30: J1.80 U1.T11 | length 22.3
  Top Layer w6.25: U1.T11@4909.49,3106.38 v1(4925.24,3090.63)
MCU_GPIO31: J1.82 R69.1 U1.U11 U2.1 | length 22.3
  Top Layer w6.25: U1.U11@4909.49,3074.88 v1(4925.24,3059.13)
MCU_GPIO32: J1.85 U1.U13 | length 22.3
  Top Layer w6.25: U1.U13@4972.48,3074.88 v1(4988.23,3059.13)
MCU_GPIO33: J1.87 U1.T13 | length 22.3
  Top Layer w6.25: U1.T13@4972.48,3106.38 v1(4988.23,3090.63)
MCU_GPIO35: J2.21 U1.T14 | length 22.3
  Top Layer w6.25: U1.T14@5003.98,3106.38 v1(5019.72,3090.63)
MCU_GPIO36: J2.22 U1.V16 | length 22.3
  Top Layer w6.25: U1.V16@5066.97,3043.39 v1(5082.72,3027.64)
MCU_GPIO37: J2.23 U1.U16 | length 22.3
  Top Layer w6.25: U1.U16@5066.97,3074.88 v1(5082.72,3059.13)
MCU_GPIO38: J2.24 U1.T16 | length 22.3
  Top Layer w6.25: U1.T16@5066.97,3106.38 v1(5082.72,3090.63)
MCU_GPIO39: J1.88 U1.W17 | length 22.3
  Top Layer w6.25: U1.W17@5098.46,3011.89 v1(5114.21,2996.14)
MCU_GPIO40: J1.89 U1.V17 | length 22.3
  Top Layer w6.25: U1.V17@5098.46,3043.39 v1(5114.21,3027.64)